# EAGLE board MultipleNixie (EAGLE 7.4.0), part 1 of 2
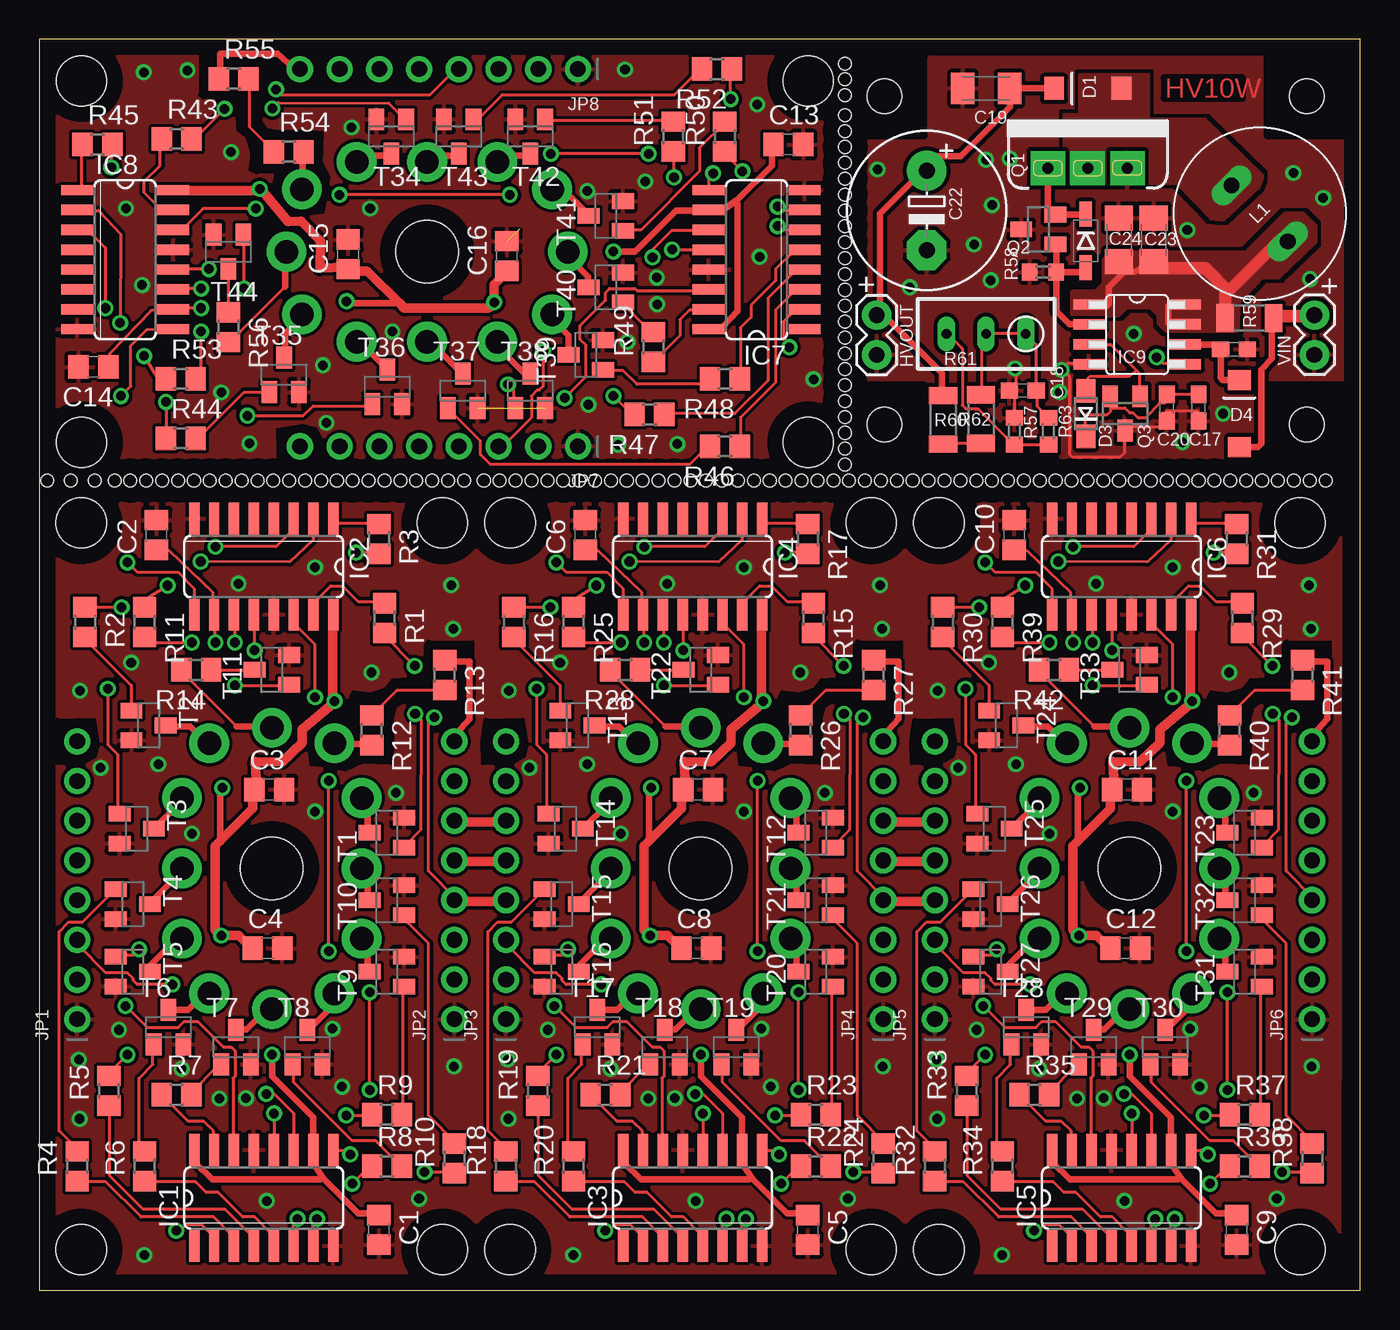
[diagram p0: board, top side]
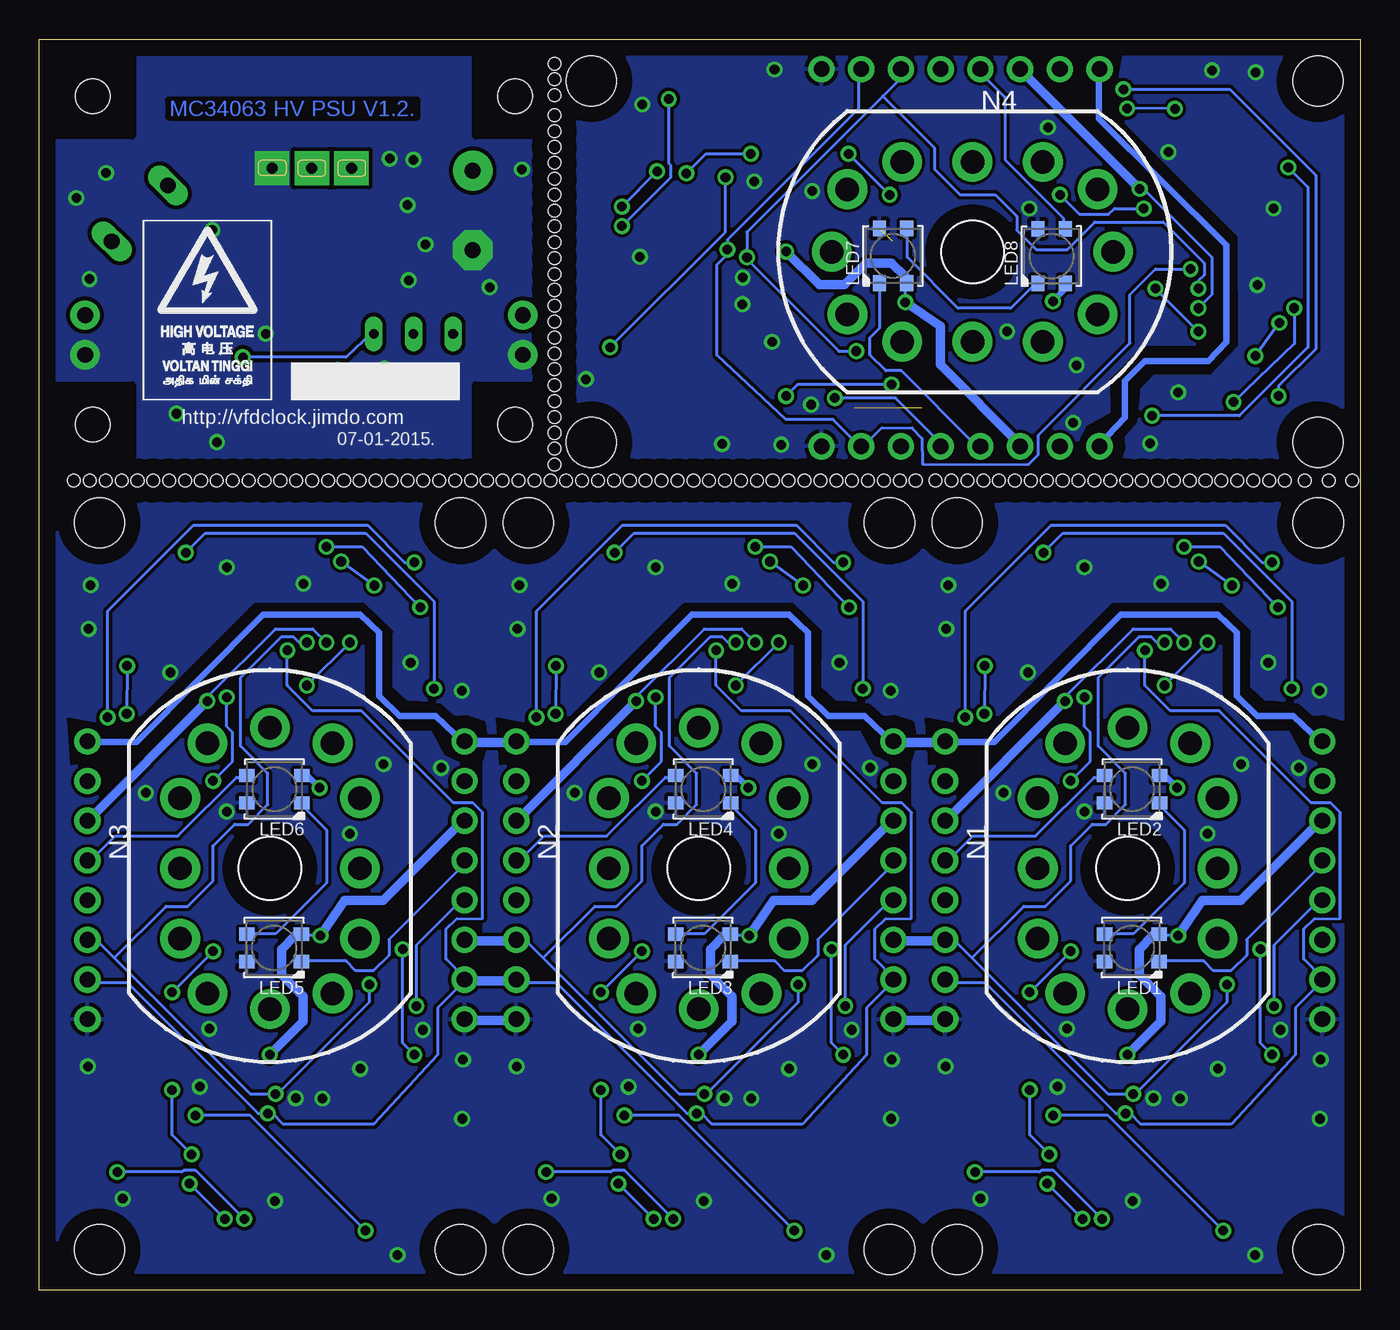
[diagram p1: board, bottom side, seen from below]

Size 84.52 x 80.05 mm. Coordinates in mm from the lower left corner, seen from the top.
Outline: 0,0 84.52,0 84.52,80.05 0,80.05 0,0
Copper layers (1*16): Top 0.035mm / dielectric 1.5mm / Bottom 0.035mm
Design rules "default *": minimum track width 8mil, minimum drill 24mil, track to track 8mil, track to pad 8mil, pad to pad 8mil, via to via 8mil, smd to smd 8mil, copper to edge 40mil, drill to drill 8mil, minimum pad ring 10mil, minimum via ring 8mil, stop-mask expansion 4mil, vias tented up to drill 0mil, thermal gap 10mil
Holes 3.2 mm at 2.69,2.62 25.81,2.62 25.81,49.1 2.69,49.1 30.12,2.62 53.24,2.62 53.24,49.1 30.12,49.1 57.56,2.62 80.67,2.62 80.67,49.1 57.56,49.1 49.2,54.25 49.2,77.37 2.72,77.37 2.72,54.25
Holes 2.2 mm at 81.08,76.39 54.08,76.39 54.08,55.39 81.08,55.39
Holes 0.8 mm at 0.51,51.82 2.03,51.82 3.56,51.82 4.83,51.82 5.84,51.82 6.86,51.82 7.87,51.82 8.89,51.82 9.91,51.82 10.92,51.82 11.94,51.82 12.95,51.82 13.97,51.82 14.99,51.82 16,51.82 17.02,51.82 18.03,51.82 18.03,51.82 19.05,51.82 20.07,51.82 21.08,51.82 22.1,51.82 23.11,51.82 24.13,51.82 25.15,51.82 26.16,51.82 27.18,51.82 28.45,51.82 29.46,51.82 30.48,51.82 31.5,51.82 32.51,51.82 33.53,51.82 34.54,51.82 35.56,51.82 36.58,51.82 37.59,51.82 38.61,51.82 39.62,51.82 40.64,51.82 41.66,51.82 42.67,51.82 43.69,51.82 44.7,51.82 45.72,51.82 46.74,51.82 47.75,51.82 48.77,51.82 49.78,51.82 50.8,51.82 51.82,51.82 52.83,51.82 53.85,51.82 54.86,51.82 55.88,51.82 56.9,51.82 57.91,51.82 58.93,51.82 59.94,51.82 60.96,51.82 61.98,51.82 62.99,51.82 64.01,51.82 65.02,51.82 66.04,51.82 67.06,51.82 68.07,51.82 69.09,51.82 70.1,51.82 71.12,51.82 72.14,51.82 73.15,51.82 74.17,51.82 75.18,51.82 76.2,51.82 77.22,51.82 78.23,51.82 79.25,51.82 80.26,51.82 81.28,51.82 82.3,51.82 51.56,52.83 51.56,53.85 51.56,54.86 51.56,55.88 51.56,56.9 51.56,57.91 51.56,58.93 51.56,59.94 51.56,60.96 51.56,61.98 51.56,62.99 51.56,64.01 51.56,65.02 51.56,66.04 51.56,67.06 51.56,68.07 51.56,69.09 51.56,70.1 51.56,71.12 51.56,72.14 51.56,73.15 51.56,74.17 51.56,75.18 51.56,76.45 51.56,77.47 51.56,78.49
tRestrict: area 17.1,33.3 to 27.7,41.5; area 0.9,33.7 to 3.8,36.5; area 44.6,33.3 to 55.1,41.5; area 28.4,33.7 to 31.2,36.5; area 72,33.3 to 82.6,41.5; area 55.8,33.7 to 58.6,36.5; area 10.3,68.7 to 18.5,79.3; area 15.3,52.5 to 18.1,55.3; area 78.6,73.9 to 83.6,78.9; area 51.6,73.9 to 56.6,78.9; area 51.6,52.9 to 56.6,57.9; area 78.6,52.9 to 83.6,57.9
bRestrict: area 1,33.7 to 27.8,43.9; area 28.4,33.7 to 55.2,43.9; area 55.9,33.7 to 82.6,43.9; area 8,52.6 to 18.1,79.3; area 51.6,52.9 to 56.6,57.9; area 78.6,52.9 to 83.6,57.9; area 78.6,73.9 to 83.6,78.9; area 51.6,73.9 to 56.6,78.9

## Footprints (pad centres in the part's own frame; a part is rotated, then mirrored left to right if it is on the bottom)
C0805 = smd 1.3 x 1.5: 1 -0.95,0; 2 0.95,0
C0603 = smd 1.1 x 1: 1 -0.85,0; 2 0.85,0
C1206K = smd 1.5 x 2: 1 -1.5,0; 2 1.5,0
E5-10,5 = drill 1.016 pad 2.54: + -2.54,0 | drill 1.016 pad 2.54 octagon: - 2.54,0
C1206 = smd 1.6 x 1.8: 1 -1.4,0; 2 1.4,0
SMA-DIODE = smd 1.27 x 1.47: A -2.15,0; C 2.15,0
SOD123 = smd 1.6 x 0.8: A 1.7,0; C -1.7,0
SOD323-W = smd 1.5 x 1.2: A 1.45,0; C -1.45,0
1X02 = drill 1.016 pad 1.88: 1 0,0; 2 2.54,0
SO16 = smd 0.66 x 2.032: 1 -4.445,-3.073; 2 -3.175,-3.073; 3 -1.905,-3.073; 4 -0.635,-3.073; 5 0.635,-3.073; 6 1.905,-3.073; 7 3.175,-3.073; 8 4.445,-3.073; 9 4.445,3.073; 10 3.175,3.073; 11 1.905,3.073; 12 0.635,3.073; 13 -0.635,3.073; 14 -1.905,3.073; 15 -3.175,3.073; 16 -4.445,3.073
SO8 = smd 0.66 x 2.032: 1 -1.905,-3.073; 2 -0.635,-3.073; 3 0.635,-3.073; 4 1.905,-3.073; 5 1.905,3.073; 6 0.635,3.073; 7 -0.635,3.073; 8 -1.905,3.073
1X08_ROUND = drill 1 pad 1.676: 1 -8.89,0; 2 -6.35,0; 3 -3.81,0; 4 -1.27,0; 5 1.27,0; 6 3.81,0; 7 6.35,0; 8 8.89,0
INDUCTOR11X11 = drill 1 long: P$1 -2.54,0; P$2 2.54,0
LED3535 = smd 1 x 0.85: 1 -1.75,0.875; 2 -1.75,-0.875; 3 1.75,-0.875; 4 1.75,0.875
IN-12-1.5 = drill 1.5 pad 2.54: 0 5.75,-4.5; 1 -4,-8; 2 -5.75,-4.5; 3 -5.75,0; 4 -5.75,4.5; 5 -4,8; 6 0,9; 7 4,8; 8 5.75,4.5; 9 5.75,0; A 4,-8; LHDP 0,-9 | hole 4: 0,0
TO220V-BIGHOLE-V2 = drill 0.7 pad 2.2 square: 1 -2.54,0; 2 0,0; 3 2.54,0
SOT23-BEC = smd 1 x 1.4: 1 -0.95,-1.1; 2 0.95,-1.1; 3 0,1.1
R0805 = smd 1.3 x 1.5: 1 -0.95,0; 2 0.95,0
R0603 = smd 1 x 1.1: 1 -0.85,0; 2 0.85,0
R1206 = smd 1.1 x 1.8: 1 -1.55,0; 2 1.55,0
RTRIM3296W = drill 0.61 long: 1 0,-2.54; 2 0,0; 3 0,2.54
SOT23-BEC' = smd 1 x 1.4: B -0.95,-1.1; C 0,1.1; E 0.95,-1.1

## Placement (x,y rotation side)
C1  0.1  [C0805]  21.74,3.89 270 top
C2  0.1  [C0805]  7.52,48.34 90 top
C3  0.1  [C0805]  14.72,32.05 0 top
C4  0.1  [C0805]  14.61,21.89 0 top
C5  0.1  [C0805]  49.17,3.89 270 top
C6  0.1  [C0805]  34.95,48.34 90 top
C7  0.1  [C0805]  42.16,32.05 0 top
C8  0.1  [C0805]  42.04,21.89 0 top
C9  0.1  [C0805]  76.61,3.89 270 top
C10  0.1  [C0805]  62.38,48.34 90 top
C11  0.1  [C0805]  69.59,32.05 0 top
C12  0.1  [C0805]  69.48,21.89 0 top
C13  0.1  [C0805]  47.93,73.3 0 top
C14  0.1  [C0805]  3.48,59.08 180 top
C15  0.1  [C0805]  19.77,66.29 90 top
C16  0.1  [C0805]  29.92,66.17 90 top
C17  390pF  [C0603]  74.16,56.48 90 top
C18  10nF  [C0603]  62.92,57.57 180 top
C19  0u1/250V  [C1206K]  60.58,76.89 180 top
C20  100pF  [C0603]  72.14,56.48 90 top
C21  0u1  [C0603]  76.43,60.21 180 top
C22  [E5-10,5]  56.78,69.09 270 top
C23  0u1/35v  [C1206]  71.29,67.2 90 top
C24  100uF/35V  [C1206]  69.08,67.2 90 top
D1  DIODE-SCHOTTKYSMA  [SMA-DIODE]  67.08,76.89 180 top
D2  T4  [SOD123]  66.95,67.14 270 top
D3  T4  [SOD323-W]  66.95,56.09 90 top
D4  [SMA-DIODE]  76.78,56.09 90 top
HVOUT  [1X02]  53.58,59.85 90 top
IC1  74HC595D  [SO16]  14.38,5.92 0 top
IC2  74HC595D  [SO16]  14.38,46.3 180 top
IC3  74HC595D  [SO16]  41.81,5.92 0 top
IC4  74HC595D  [SO16]  41.81,46.3 180 top
IC5  74HC595D  [SO16]  69.24,5.92 0 top
IC6  74HC595D  [SO16]  69.24,46.3 180 top
IC7  74HC595D  [SO16]  45.9,65.94 90 top
IC8  74HC595D  [SO16]  5.51,65.94 270 top
IC9  MC34063-SO  [SO8]  70.23,61.16 270 top
JP1  [1X08_ROUND]  2.44,26.24 90 top
JP2  [1X08_ROUND]  26.57,26.24 90 top
JP3  [1X08_ROUND]  29.87,26.24 90 top
JP4  [1X08_ROUND]  54,26.24 90 top
JP5  [1X08_ROUND]  57.3,26.24 90 top
JP6  [1X08_ROUND]  81.43,26.24 90 top
JP7  [1X08_ROUND]  25.58,54 180 top
JP8  [1X08_ROUND]  25.58,78.13 180 top
L1  100uH  [INDUCTOR11X11]  78.08,68.89 315 top
LED1  WS2812B3535  [LED3535]  14.62,21.92 180 bottom
LED2  WS2812B3535  [LED3535]  14.61,32.07 180 bottom
LED3  WS2812B3535  [LED3535]  42.06,21.92 180 bottom
LED4  WS2812B3535  [LED3535]  42.04,32.07 180 bottom
LED5  WS2812B3535  [LED3535]  69.49,21.92 180 bottom
LED6  WS2812B3535  [LED3535]  69.47,32.07 180 bottom
LED7  WS2812B3535  [LED3535]  29.9,66.19 90 bottom
LED8  WS2812B3535  [LED3535]  19.75,66.17 90 bottom
N1  IN-12B1.5MM  [IN-12-1.5]  14.88,27 180 bottom
N2  IN-12B1.5MM  [IN-12-1.5]  42.32,27 180 bottom
N3  IN-12B1.5MM  [IN-12-1.5]  69.75,27 180 bottom
N4  IN-12B1.5MM  [IN-12-1.5]  24.82,66.45 90 bottom
Q1  [TO220V-BIGHOLE-V2]  67.08,71.79 0 top
Q2  PNP  [SOT23-BEC]  63.92,67.87 90 top
Q3  PNP  [SOT23-BEC]  69.47,56.09 180 top
R1  10k  [R0805]  22.1,43.01 270 top
R2  10k  [R0805]  2.95,42.75 270 top
R3  10k  [R0805]  21.74,48.08 270 top
R4  10k  [R0805]  2.44,7.95 90 top
R5  10k  [R0805]  4.47,12.78 90 top
R6  10k  [R0805]  6.76,7.95 90 top
R7  10k  [R0805]  8.79,12.52 0 top
R8  10k  [R0805]  22.25,7.95 0 top
R9  10k  [R0805]  22.25,11.25 0 top
R10  10k  [R0805]  26.57,8.46 90 top
R11  10k  [R0805]  6.76,42.75 270 top
R12  15k  [R0805]  21.28,35.84 270 top
R13  15k  [R0805]  25.94,39.37 270 top
R14  10k  [R0805]  10.06,39.7 180 top
R15  10k  [R0805]  49.53,43.01 270 top
R16  10k  [R0805]  30.38,42.75 270 top
R17  10k  [R0805]  49.17,48.08 270 top
R18  10k  [R0805]  29.87,7.95 90 top
R19  10k  [R0805]  31.9,12.78 90 top
R20  10k  [R0805]  34.19,7.95 90 top
R21  10k  [R0805]  36.22,12.52 0 top
R22  10k  [R0805]  49.68,7.95 0 top
R23  10k  [R0805]  49.68,11.25 0 top
R24  10k  [R0805]  54,8.46 90 top
R25  10k  [R0805]  34.19,42.75 270 top
R26  15k  [R0805]  48.71,35.84 270 top
R27  15k  [R0805]  53.38,39.37 270 top
R28  10k  [R0805]  37.49,39.7 180 top
R29  10k  [R0805]  76.97,43.01 270 top
R30  10k  [R0805]  57.81,42.75 270 top
R31  10k  [R0805]  76.61,48.08 270 top
R32  10k  [R0805]  57.3,7.95 90 top
R33  10k  [R0805]  59.33,12.78 90 top
R34  10k  [R0805]  61.62,7.95 90 top
R35  10k  [R0805]  63.65,12.52 0 top
R36  10k  [R0805]  77.11,7.95 0 top
R37  10k  [R0805]  77.11,11.25 0 top
R38  10k  [R0805]  81.43,8.46 90 top
R39  10k  [R0805]  61.62,42.75 270 top
R40  15k  [R0805]  76.15,35.84 270 top
R41  15k  [R0805]  80.81,39.37 270 top
R42  10k  [R0805]  64.92,39.7 180 top
R43  10k  [R0805]  8.81,73.66 0 top
R44  10k  [R0805]  9.07,54.51 0 top
R45  10k  [R0805]  3.73,73.3 0 top
R46  10k  [R0805]  43.87,54 180 top
R47  10k  [R0805]  39.04,56.03 180 top
R48  10k  [R0805]  43.87,58.32 180 top
R49  10k  [R0805]  39.29,60.35 90 top
R50  10k  [R0805]  43.87,73.81 90 top
R51  10k  [R0805]  40.56,73.81 90 top
R52  10k  [R0805]  43.36,78.13 180 top
R53  10k  [R0805]  9.07,58.32 0 top
R54  15k  [R0805]  15.98,72.84 0 top
R55  15k  [R0805]  12.45,77.51 0 top
R56  10k  [R0805]  12.12,61.62 270 top
R57  12k  [R0603]  62.39,54.97 270 top
R58  1k0  [R0603]  64.22,65.15 0 top
R59  0r25  [R1206]  77.41,62.2 0 top
R60  1M  [R1206]  57.83,55.69 90 top
R61  20k  [RTRIM3296W]  60.58,61.19 90 top
R62  1M  [R1206]  60.25,55.74 90 top
R63  50k  [R0603]  64.57,54.97 90 top
T1  [SOT23-BEC']  22.25,29.29 90 top
T2  [SOT23-BEC']  7.01,36.14 270 top
T3  [SOT23-BEC']  6.25,29.54 270 top
T4  [SOT23-BEC']  5.99,24.71 270 top
T5  [SOT23-BEC']  5.99,20.4 270 top
T6  [SOT23-BEC']  8.28,16.84 0 top
T7  [SOT23-BEC']  12.6,15.57 0 top
T8  [SOT23-BEC']  17.17,15.57 0 top
T9  [SOT23-BEC']  22.25,20.4 90 top
T10  [SOT23-BEC']  22.25,24.97 90 top
T11  [SOT23-BEC']  14.88,39.7 90 top
T12  [SOT23-BEC']  49.68,29.29 90 top
T13  [SOT23-BEC']  34.44,36.14 270 top
T14  [SOT23-BEC']  33.68,29.54 270 top
T15  [SOT23-BEC']  33.43,24.71 270 top
T16  [SOT23-BEC']  33.43,20.4 270 top
T17  [SOT23-BEC']  35.71,16.84 0 top
T18  [SOT23-BEC']  40.03,15.57 0 top
T19  [SOT23-BEC']  44.6,15.57 0 top
T20  [SOT23-BEC']  49.68,20.4 90 top
T21  [SOT23-BEC']  49.68,24.97 90 top
T22  [SOT23-BEC']  42.32,39.7 90 top
T23  [SOT23-BEC']  77.11,29.29 90 top
T24  [SOT23-BEC']  61.87,36.14 270 top
T25  [SOT23-BEC']  61.11,29.54 270 top
T26  [SOT23-BEC']  60.86,24.71 270 top
T27  [SOT23-BEC']  60.86,20.4 270 top
T28  [SOT23-BEC']  63.14,16.84 0 top
T29  [SOT23-BEC']  67.46,15.57 0 top
T30  [SOT23-BEC']  72.03,15.57 0 top
T31  [SOT23-BEC']  77.11,20.4 90 top
T32  [SOT23-BEC']  77.11,24.97 90 top
T33  [SOT23-BEC']  69.75,39.7 90 top
T34  [SOT23-BEC']  22.53,73.81 180 top
T35  [SOT23-BEC']  15.67,58.57 0 top
T36  [SOT23-BEC']  22.28,57.81 0 top
T37  [SOT23-BEC']  27.1,57.56 0 top
T38  [SOT23-BEC']  31.42,57.56 0 top
T39  [SOT23-BEC']  34.98,59.84 90 top
T40  [SOT23-BEC']  36.25,64.16 90 top
T41  [SOT23-BEC']  36.25,68.73 90 top
T42  [SOT23-BEC']  31.42,73.81 180 top
T43  [SOT23-BEC']  26.85,73.81 180 top
T44  [SOT23-BEC']  12.12,66.45 180 top
U$1  [HV03]  77.89,56.93 0 bottom
VIN  [1X02]  81.58,62.39 270 top

## Library data of the parts
C1-C16 = rcl
C17-C24 D1-D4 L1 Q2 Q3 R57-R60 R62 R63 = trans
HVOUT VIN = SparkFun
IC1-IC8 = 74xx-eu
IC9 = mc34063
JP1-JP8 = Adafruit CP2104
LED1-LED8 = adafruit
N1-N4 = russian-nixies
Q1 = my-mosfet
R1-R56 = resistor
R61 = switch
T1-T44 = transistor-neu-to92
U$1 = marks

## Nets
+5V: C1.1 C2.1 C3.1 C4.1 IC1.10 IC1.16 IC2.10 IC2.16 JP1.6 JP2.6 LED1.2 LED2.2
+5V1: C5.1 C6.1 C7.1 C8.1 IC3.10 IC3.16 IC4.10 IC4.16 JP3.6 JP4.6 LED3.2 LED4.2
+5V2: C9.1 C10.1 C11.1 C12.1 IC5.10 IC5.16 IC6.10 IC6.16 JP5.6 JP6.6 LED5.2 LED6.2
+5V3: C13.1 C14.1 C15.1 C16.1 IC7.10 IC7.16 IC8.10 IC8.16 JP7.6 JP8.6 LED7.2 LED8.2
+200V: JP1.8 JP2.8 R13.1
+200V1: JP3.8 JP4.8 R27.1
+200V2: JP5.8 JP6.8 R41.1
+200V3: JP7.8 JP8.8 R55.1
ANODE: N1.A R12.2
ANODE1: N2.A R26.2
ANODE2: N3.A R40.2
ANODE3: N4.A R54.2
GND: C1.2 C2.2 C3.2 C4.2 C5.2 C6.2 C7.2 C8.2 C9.2 C10.2 C11.2 C12.2 IC1.8 IC1.13 IC2.8 IC2.13 IC3.8 IC3.13 IC4.8 IC4.13 IC5.8 IC5.13 IC6.8 IC6.13 JP1.1 JP2.1 JP3.1 JP4.1 JP5.1 JP6.1 LED1.4 LED2.4 LED3.4 LED4.4 LED5.4 LED6.4 T1.E T2.E T3.E T4.E T5.E T6.E T7.E T8.E T9.E T10.E T11.E T12.E T13.E T14.E T15.E T16.E T17.E T18.E T19.E T20.E T21.E T22.E T23.E T24.E T25.E T26.E T27.E T28.E T29.E T30.E T31.E T32.E T33.E
GND3: C13.2 C14.2 C15.2 C16.2 IC7.8 IC7.13 IC8.8 IC8.13 JP7.1 JP8.1 LED7.4 LED8.4 T34.E T35.E T36.E T37.E T38.E T39.E T40.E T41.E T42.E T43.E T44.E
GND4: C17.1 C18.2 C19.2 C20.1 C21.1 C22.- C23.2 C24.2 HVOUT.1 IC9.4 Q1.3 Q2.3 Q3.3 R57.1 R58.1 VIN.2
HVFB: C18.1 IC9.5 R61.1 R61.2 R62.2 R63.2
K0: N1.0 T1.C
K1: N1.1 T2.C
K2: N1.2 T3.C
K3: N1.3 T4.C
K4: N1.4 T5.C
K5: N1.5 T6.C
K6: N1.6 T7.C
K7: N1.7 T8.C
K8: N1.8 T9.C
K9: N1.9 T10.C
K10: N2.0 T12.C
K11: N2.1 T13.C
K12: N2.2 T14.C
K13: N2.3 T15.C
K14: N2.4 T16.C
K15: N2.5 T17.C
K16: N2.6 T18.C
K17: N2.7 T19.C
K18: N2.8 T20.C
K19: N2.9 T21.C
K20: N3.0 T23.C
K21: N3.1 T24.C
K22: N3.2 T25.C
K23: N3.3 T26.C
K24: N3.4 T27.C
K25: N3.5 T28.C
K26: N3.6 T29.C
K27: N3.7 T30.C
K28: N3.8 T31.C
K29: N3.9 T32.C
K30: N4.0 T34.C
K31: N4.1 T35.C
K32: N4.2 T36.C
K33: N4.3 T37.C
K34: N4.4 T38.C
K35: N4.5 T39.C
K36: N4.6 T40.C
K37: N4.7 T41.C
K38: N4.8 T42.C
K39: N4.9 T43.C
KDP: N1.LHDP R14.2
KDP1: N2.LHDP R28.2
KDP2: N3.LHDP R42.2
KDP3: N4.LHDP R56.2
KDPT: IC2.2 R11.1
KDPT1: IC4.2 R25.1
KDPT2: IC6.2 R39.1
KDPT3: IC8.2 R53.1
KT0: IC1.15 R7.1
KT1: IC2.3 R2.1
KT2: IC1.2 R9.1
KT3: IC1.3 R4.1
KT4: IC1.4 R5.1
KT5: IC1.5 R6.1
KT6: IC1.6 R10.1
KT7: IC1.7 R8.1
KT8: IC2.15 R1.1
KT9: IC2.1 R3.1
KT10: IC3.15 R21.1
KT11: IC4.3 R16.1
KT12: IC3.2 R23.1
KT13: IC3.3 R18.1
KT14: IC3.4 R19.1
KT15: IC3.5 R20.1
KT16: IC3.6 R24.1
KT17: IC3.7 R22.1
KT18: IC4.15 R15.1
KT19: IC4.1 R17.1
KT20: IC5.15 R35.1
KT21: IC6.3 R30.1
KT22: IC5.2 R37.1
KT23: IC5.3 R32.1
KT24: IC5.4 R33.1
KT25: IC5.5 R34.1
KT26: IC5.6 R38.1
KT27: IC5.7 R36.1
KT28: IC6.15 R29.1
KT29: IC6.1 R31.1
KT30: IC7.15 R49.1
KT31: IC8.3 R44.1
KT32: IC7.2 R51.1
KT33: IC7.3 R46.1
KT34: IC7.4 R47.1
KT35: IC7.5 R48.1
KT36: IC7.6 R52.1
KT37: IC7.7 R50.1
KT38: IC8.15 R43.1
KT39: IC8.1 R45.1
N$1: R3.2 T3.B
N$2: R1.2 T1.B
N$3: R2.2 T2.B
N$4: R4.2 T4.B
N$5: R5.2 T5.B
N$6: R6.2 T6.B
N$7: R7.2 T7.B
N$8: R8.2 T8.B
N$9: R9.2 T9.B
N$10: R10.2 T10.B
N$11: LED1.3 LED2.1
N$12: JP1.5 LED1.1
N$13: JP2.5 LED2.3
N$14: R15.2 T12.B
N$15: R16.2 T13.B
N$16: R17.2 T14.B
N$17: R18.2 T15.B
N$18: R19.2 T16.B
N$19: R20.2 T17.B
N$20: R21.2 T18.B
N$21: R11.2 T11.B
N$22: IC1.14 JP1.4
N$23: R14.1 T11.C
N$24: R12.1 R13.2
N$25: IC1.9 IC2.14
N$26: IC1.11 IC2.11 JP1.3 JP2.3
N$27: IC1.12 IC2.12 JP1.2 JP2.2
N$28: IC2.9 JP2.4
N$29: R22.2 T19.B
N$30: R23.2 T20.B
N$31: R24.2 T21.B
N$32: R25.2 T22.B
N$33: R28.1 T22.C
N$34: R26.1 R27.2
N$35: IC3.14 JP3.4
N$36: IC3.9 IC4.14
N$37: IC3.11 IC4.11 JP3.3 JP4.3
N$38: IC3.12 IC4.12 JP3.2 JP4.2
N$39: IC4.9 JP4.4
N$40: LED3.3 LED4.1
N$41: JP3.5 LED3.1
N$42: JP4.5 LED4.3
N$43: R29.2 T23.B
N$44: R30.2 T24.B
N$45: R31.2 T25.B
N$46: R32.2 T26.B
N$47: R33.2 T27.B
N$48: R34.2 T28.B
N$49: R35.2 T29.B
N$50: R36.2 T30.B
N$51: R37.2 T31.B
N$52: R38.2 T32.B
N$53: R39.2 T33.B
N$54: R42.1 T33.C
N$55: R40.1 R41.2
N$56: IC5.14 JP5.4
N$57: IC5.9 IC6.14
N$58: IC5.11 IC6.11 JP5.3 JP6.3
N$59: IC5.12 IC6.12 JP5.2 JP6.2
N$60: IC6.9 JP6.4
N$61: LED5.3 LED6.1
N$62: JP5.5 LED5.1
N$63: JP6.5 LED6.3
N$64: R43.2 T34.B
N$65: R44.2 T35.B
N$66: R45.2 T36.B
N$67: R46.2 T37.B
N$68: R47.2 T38.B
N$69: R48.2 T39.B
N$70: R49.2 T40.B
N$71: R50.2 T41.B
N$72: R51.2 T42.B
N$73: R52.2 T43.B
N$74: R53.2 T44.B
N$75: R56.1 T44.C
N$76: R54.1 R55.2
N$77: IC7.14 JP7.4
N$78: IC7.9 IC8.14
N$79: IC7.11 IC8.11 JP7.3 JP8.3
N$80: IC7.12 IC8.12 JP7.2 JP8.2
N$81: IC8.9 JP8.4
N$82: LED7.3 LED8.1
N$83: JP7.5 LED7.1
N$84: JP8.5 LED8.3
N$85: C17.2 C20.2 D3.C Q3.2
N$86: D2.A IC9.2 Q2.1 R58.2
N$87: D2.C Q1.1 Q2.2
N$88: C19.1 C22.+ D1.C HVOUT.2 R60.2
N$89: R60.1 R62.1
N$90: R57.2 R61.3 R63.1
N$91: C21.2 D4.C IC9.6
N$92: D3.A IC9.3 Q3.1
SUP: C23.1 C24.1 IC9.1 IC9.7 IC9.8 L1.P$2 R59.1
SW: D1.A L1.P$1 Q1.2
VCC: D4.A R59.2 VIN.1